# EAGLE board buckLed_LM3405 (EAGLE 7.6.0)
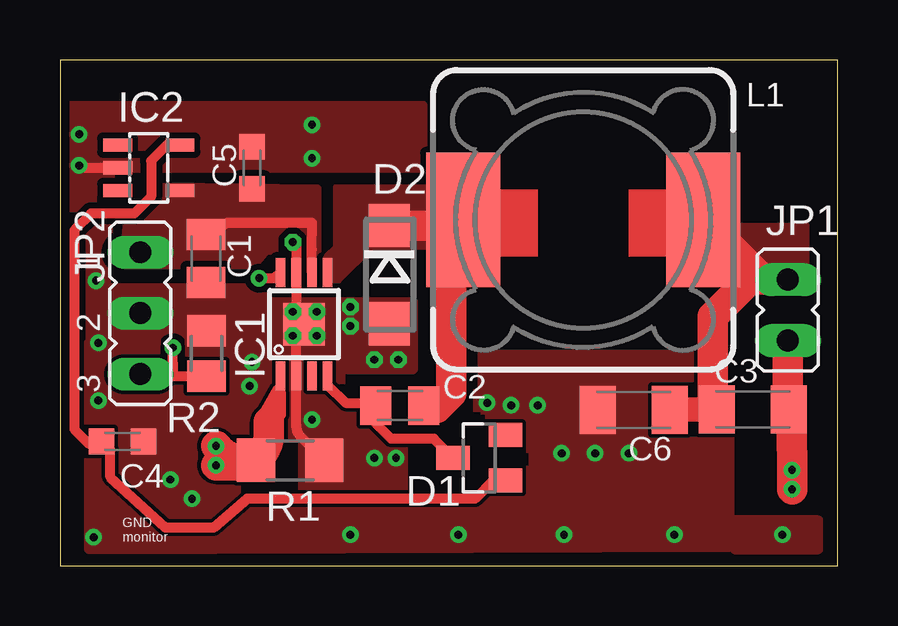
[diagram p0: board, top side]
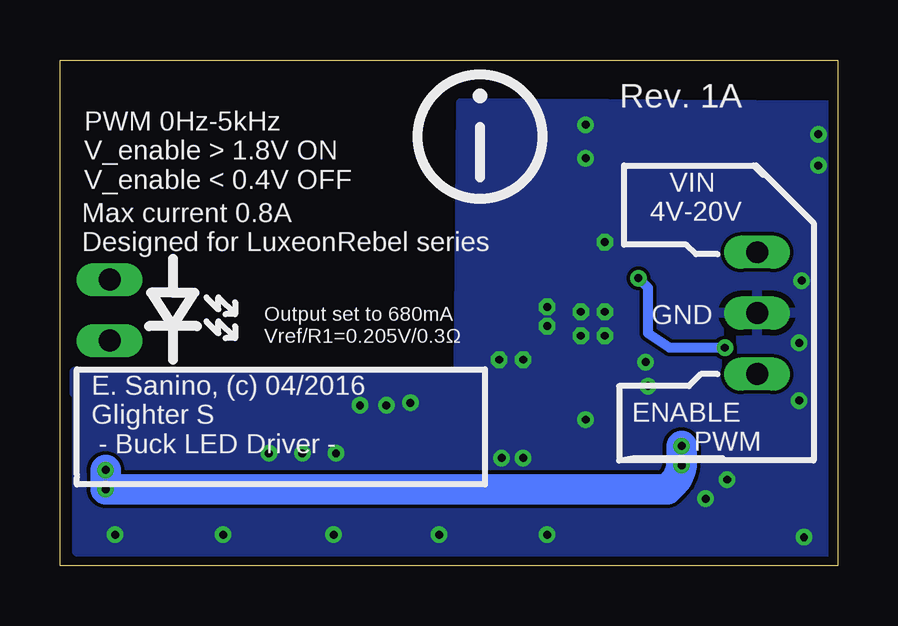
[diagram p1: board, bottom side, seen from below]

Size 32.4 x 21.1 mm. Coordinates in mm from the lower left corner, seen from the top.
Outline: 0,0 32.4,0 32.4,21.1 0,21.1 0,0
Copper layers (1*16): Top 0.0356mm / dielectric 1.5011mm / Bottom 0.0356mm
Design rules "LaenPCBOrder": minimum track width 6mil, minimum drill 13mil, track to track 6mil, track to pad 6mil, pad to pad 6mil, via to via 6mil, smd to smd 6mil, copper to edge 15mil, drill to drill 6mil, minimum pad ring 7mil, minimum via ring 7mil, stop-mask expansion 3mil, vias tented up to drill 0mil, thermal gap 10mil
tRestrict: area 9.3,3.2 to 9.9,5.2; area 16.4,5.2 to 17.5,6.4; area 14.5,3.2 to 15.5,4.8; area 17.2,3.7 to 17.7,5.2; area 15.4,3.2 to 17.2,3.9; area 17.6,4.2 to 19.5,4.7; area 17,6.3 to 17.2,6.8; area 17,6.8 to 17.2,7.4; area 17.4,5.1 to 17.7,6.3

## Footprints (pad centres in the part's own frame; a part is rotated, then mirrored left to right if it is on the bottom)
C0805K = smd 1.3 x 1.6: 1 -1,0; 2 1,0
C1206K = smd 1.5 x 2: 1 -1.5,0; 2 1.5,0
C0603K = smd 1.05 x 1.08: 1 -0.875,0; 2 0.875,0
SOT23 = smd 1 x 1.4: 1 -0.95,-1.1; 2 0.95,-1.1; 3 0,1.1
DO214AC = smd 1.8 x 1.7: A 2.05,0; C -2.05,0
S-PDSO-G08 = smd 0.4 x 1.2: 1 -0.975,-2.157; 2 -0.325,-2.157; 3 0.325,-2.157; 4 0.975,-2.157; 5 0.975,2.157; 6 0.325,2.157; 7 -0.325,2.157; 8 -0.975,2.157 | smd 1.73 x 1.78: TH 0,0
SOT25 = smd 0.55 x 1.2: 1 -0.95,-1.3; 2 0,-1.3; 3 0.95,-1.3; 4 0.95,1.3; 5 -0.95,1.3
JP1 = drill 0.914 long: 1 0,-1.27; 2 0,1.27
JP2 = drill 0.914 long: 1 -2.54,0; 2 0,0; 3 2.54,0
SRR1260 = smd 5.6 x 3.1: 1 0,5; 2 0,-5
R1206 = smd 1.6 x 1.803: 1 -1.422,0; 2 1.422,0
M0805 = smd 1.3 x 1.6: 1 -0.95,0; 2 0.95,0

## Placement (x,y rotation side)
C1  GRM21BR61E226ME44L  [C0805K]  6.08,12.82 270 top
C2  C0805C103K5RACTU  [C0805K]  14.16,6.69 0 top
C3  GRM31MR71E105KA01L  [C1206K]  28.87,6.53 0 top
C4  MC0603B105K160CT  [C0603K]  2.6,5.2 0 top
C5  MC0603B105K160CT  [C0603K]  8,16.6 90 top
C6  GRM31CR71H225KA88L  [C1206K]  23.9,6.5 180 top
D1  BAT54  [SOT23]  17.47,4.51 90 top
D2  STPS1L30A  [DO214AC]  13.72,12.15 270 top
IC1  LM3405  [S-PDSO-G08]  10.17,10.08 0 top
IC2  TPS715345DCKR  [SOT25]  3.7,16.6 270 top
JP1  [JP1]  30.33,10.67 180 top
JP2  [JP2]  3.35,10.54 270 top
L1  SRU8028A-150Y  [SRR1260]  21.8,14.43 90 top
R1  ERJ8BQFR30V  [R1206]  9.59,4.41 180 top
R2  10k  [M0805]  6.11,8.86 90 top

## Library data of the parts
C1 C4-C6 = rcl
C2 C3 R1 R2 = resistor
D1 = diode
D2 IC1 IC2 = buck
JP1 JP2 = jumper
L1 = inductor-bourns

## Nets
GND: C1.2 C4.2 C5.2 C6.2 D2.A IC1.2 IC1.7 IC1.TH IC2.2 JP2.2 R1.1 R2.2
N$2: C3.1 C6.1 JP1.1 L1.2
N$3: C2.2 D2.C IC1.5 L1.1
N$4: C2.1 D1.3 IC1.4
N$6: C3.2 IC1.1 JP1.2 R1.2
PWM: IC1.8 JP2.3 R2.1
VBOOST: C4.1 D1.1 IC2.5
VIN: C1.1 C5.1 IC1.6 IC2.4 JP2.1

## Tracks (layer width: path | path; a pad name or v marks a point on that pad's centre or on a via)
GND  (via drill 0.33)
  Top 0.305: 9.9,12.7 9.9,13.3 9.8,13.3 9.8,12.8
  Top 0.406: IC1.7 9.84,10.75 v9.7,10.6 | v9.7,9.6 9.84,9.45 IC1.2 9.84,5.84 arc45 10.03,5.39 R1.1 | IC2.2 0.8,16.6 v0.8,16.7 | 9.8,13.4 9.8,13.5 v9.7,13.5 9.7,13.3 9.8,13.3
  other vias: 10.7,10.6 10.7,9.6 12.1,10.8 12.1,10 13.1,8.6 14.1,8.6 25.6,1.3 21,1.3 12.1,1.3 16.6,1.3 5.5,2.8 8,8.5 7.9,7.5 19.9,6.7 18.8,6.7 17.8,6.8 14,4.5 13.1,4.5 20.9,4.7 22.3,4.7 23.7,4.7 1.6,9.3 1.5,11.9 1.6,6.9 10.5,17 10.5,18.4 0.8,18 4.6,3.6 10.5,6.1 1.4,1.2 30.1,1.3
  pour Top (no thermals): 27.9,8.8 17.6,8.8 17.6,7.2 11.7,6.6 11.7,9.4 1.2,9.3 1.2,0.7 27.9,0.8
  pour Top (isolate 0.254, no thermals): 1.9,11.6 8.5,11.6 9.1,9.2 1.5,9.2 1.5,2.1 0.5,2.1 0.5,19.2 15.1,19.2 15.1,16.6 2.1,16.6
  pour Top (isolate 0.254, no thermals): 7.3,11 14.7,11 14.7,8.2 11.9,8.2 11.9,9.4 7.3,9.4
  pour Bottom: 0.3,19.2 15.7,19.3 15.8,8.1 31.8,8.1 31.8,7.2 31.7,7.2 31.7,0.6 0.2,0.6
  pour Top: 31.6,1.9 28.2,1.9 28.1,1.9 28.1,0.7 31.6,0.7
N$2
  Top 0.61: 25.47,6.53 C6.1
  Top 1.016: C3.1 25.47,6.53
  Top 1.27: JP1.1 29.29,11.94 | 29.29,11.94 L1.2 | 29.29,11.94 28.74,11.94 27.2,10.4 27.2,6.7 C3.1
  pour Top (no thermals): 28.2,14.2 31.1,14.2 31.1,11.6 27.9,11.6
N$3
  Top 0.406: 16.3,13.93 L1.1
  Top 1.27: C2.2 15.25,6.6 15.7,6.6 16.3,7.2 16.3,13.93 16.22,14.01 arc45 15.77,14.2 D2.C
  pour Top (no thermals): 11.1,11.9 11.1,12.9 11.5,13.3 11.5,15.8 15.4,15.8 15.5,13.3 13,13.3 11.6,11.9
N$4
  Top 0.406: IC1.4 11.14,7.55 11.9,6.8 13.07,6.8 C2.1 13.16,5.94 13.8,5.3 15.58,5.3 D1.3
N$6  (via drill 0.33)
  Top 0.406: IC1.1 9.2,6.76 arc-45 9.01,6.31 8.7,6 8.66,6.04 arc-45 8.64,6.1 | 8.3,6 9.1,7.4 arc-45 9.2,7.16 9.2,6.3 arc45 9.1,6.06 9.1,5.9 9.09,5.91 arc45 8.64,6.1 | 8.64,6.1 8.4,6.1 9,6.7
  Top 0.813: 30.57,9.16 JP1.2
  Top 1.27: v6.5,4.2 7.96,4.2 R1.2 | R1.2 8.11,4.41 8.1,4.4 | R1.2 7.62,4.41 arc-45 6.72,4.78 v6.5,5 | v30.5,3.2 v30.5,4 30.5,4.2 30.47,6.67 C3.2 30.33,6.77 JP1.2 | R1.2 8.33,4.57 arc45 8.7,5.47 8.7,6
  Bottom 1.27: v6.5,4.2 v6.5,5 6.5,4.33 arc45 6.87,3.43 7.1,3.2 v30.5,3.2 v30.5,4
PWM  (via drill 0.33)
  Top 0.406: 4.71,7.91 3.34,7.91 JP2.3 | R2.1 4.71,7.91 | 4.71,7.91 v4.7,9.1 | v8.3,12 8.96,12 IC1.8
  Bottom 0.406: v4.7,9.1 7,9.1 7.9,9.7 7.9,11.6 v8.3,12
VBOOST
  Top 0.406: IC2.5 4.45,17.55 3.8,16.9 3.8,15.4 3.1,14.7 1.3,14.7 0.6,14 0.6,5.7 1.2,5.1 1.62,5.1 C4.1 2.1,4.82 2.1,3.7 4.4,1.6 6.4,1.6 7.8,2.8 17.3,2.8 18.06,3.56 D1.1
VIN
  Top 0.406: IC1.6 10.5,13.2 10.5,14.3 6.96,14.3 C1.1
  Top 0.813: JP2.1 3.78,13.08
  pour Top (isolate 0.254, no thermals): 2.7,12.6 8.1,12.6 8.6,13.2 10.5,13.2 10.5,12.8 10.7,12.8 10.7,15.7 2.9,15.8
(copper drawn outside any net)
  shapes: Top area x2

## Text on the board
tNames: GND / monitor
bNames: Rev. 1A | VIN / 4V-20V | PWM 0Hz-5kHz / V_enable > 1.8V ON / V_enable < 0.4V OFF | Max current 0.8A / Designed for LuxeonRebel series | GND | Output set to 680mA / Vref/R1=0.205V/0.3Ω | ENABLE / PWM | E. Sanino, (c) 04/2016 / Glighter S / - Buck LED Driver -